# Altium PCB PCB_Project_Board_4.PcbDoc
Units mil, origin at the board's own origin, x right, y up, seen from the top; angles counter-clockwise.
Board outline 3900 x 3900 mil, 4 copper layers (Top Layer, GND_UPR, GND_DWN, Bottom Layer), stack 23.756 mil thick; 91 components, 63 nets, 327 pads, 72 vias.
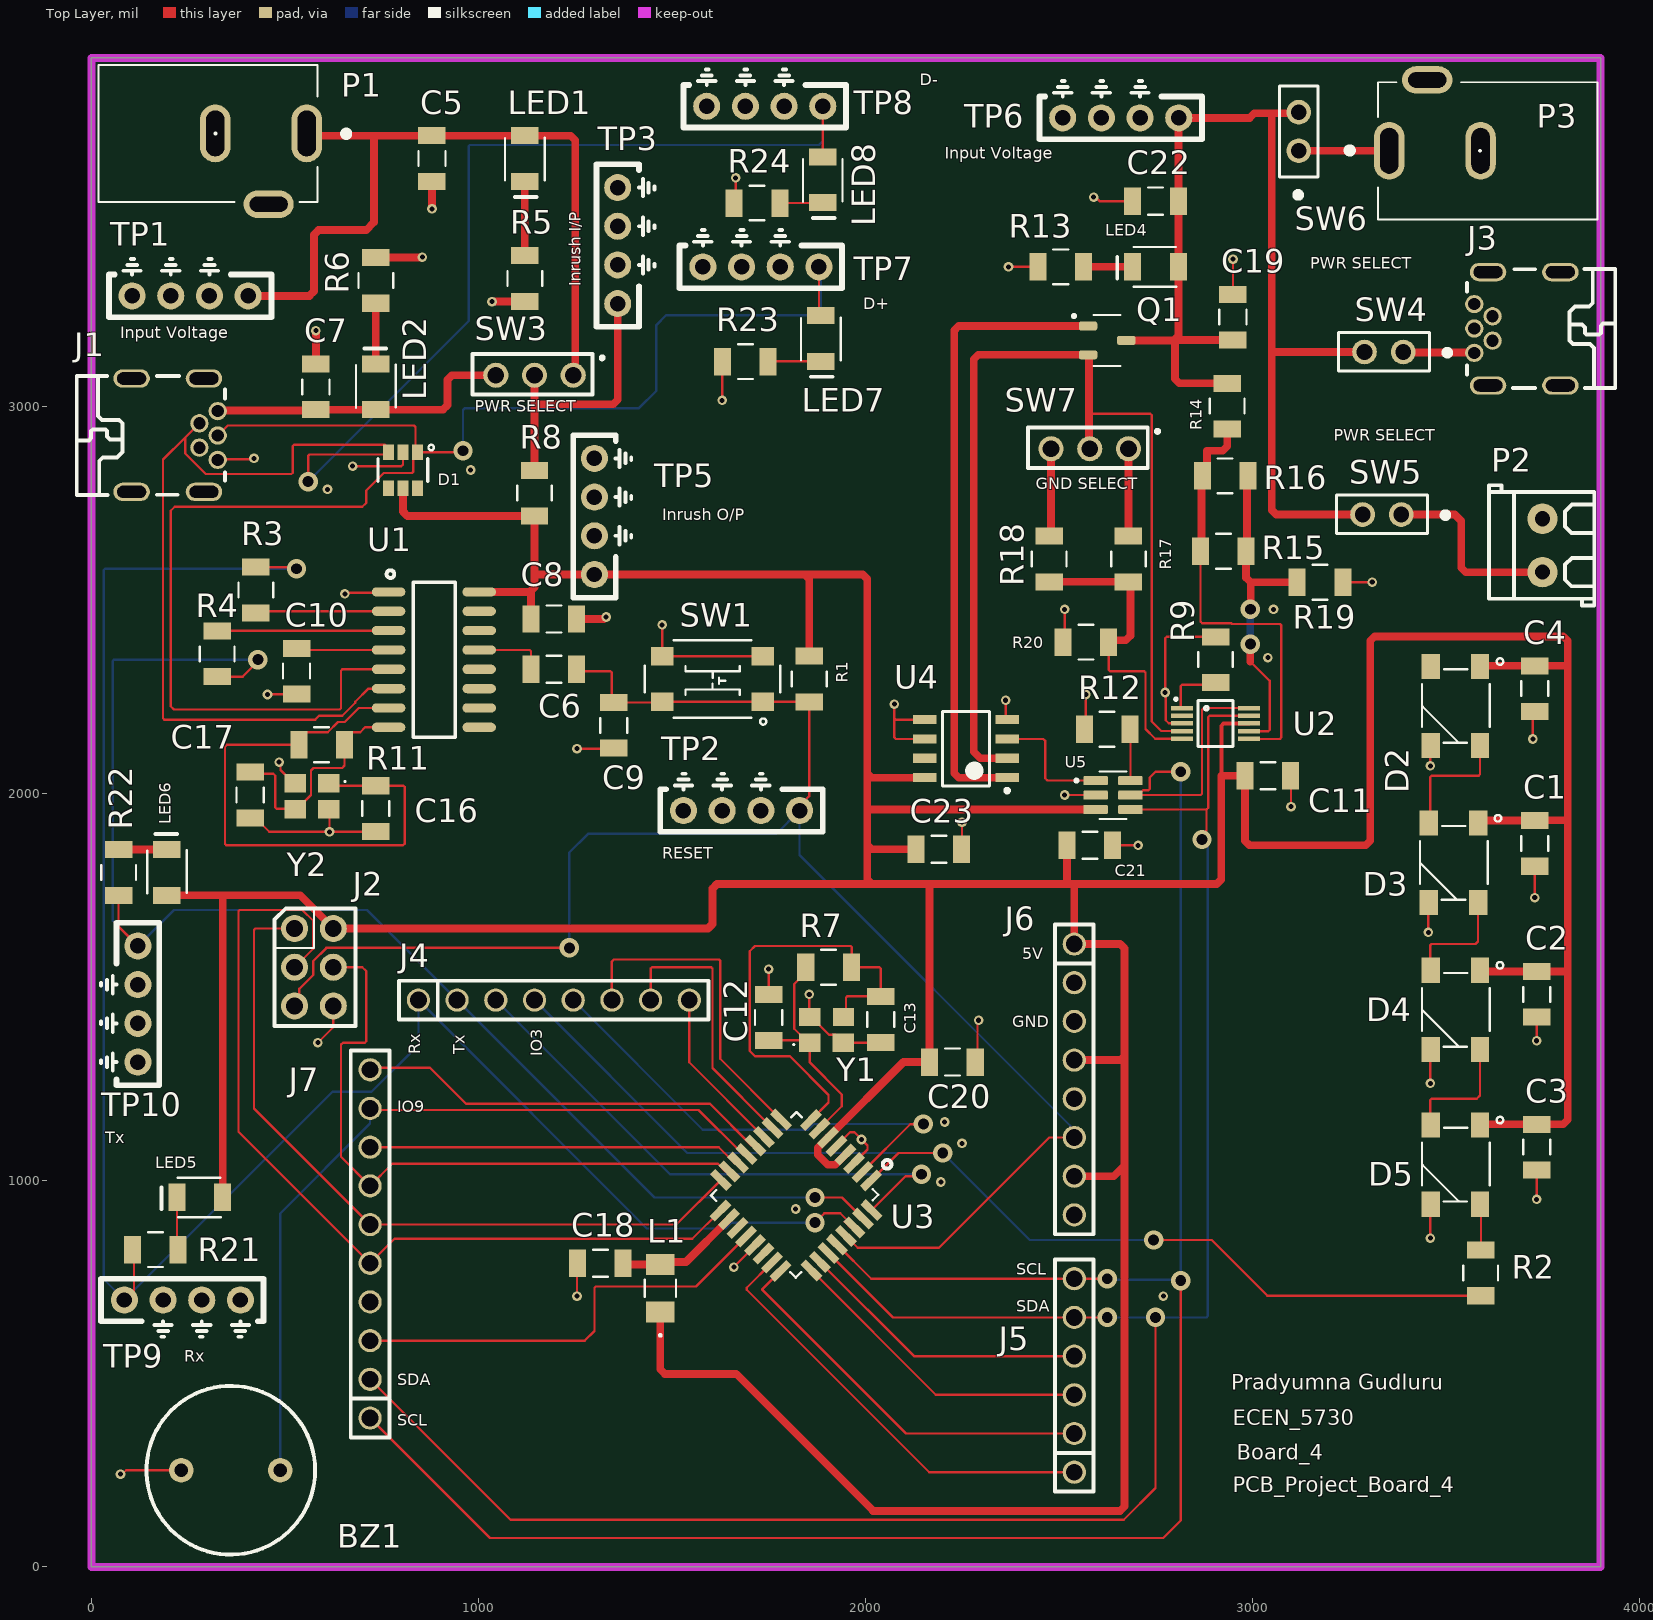
[diagram p0: Top Layer view]
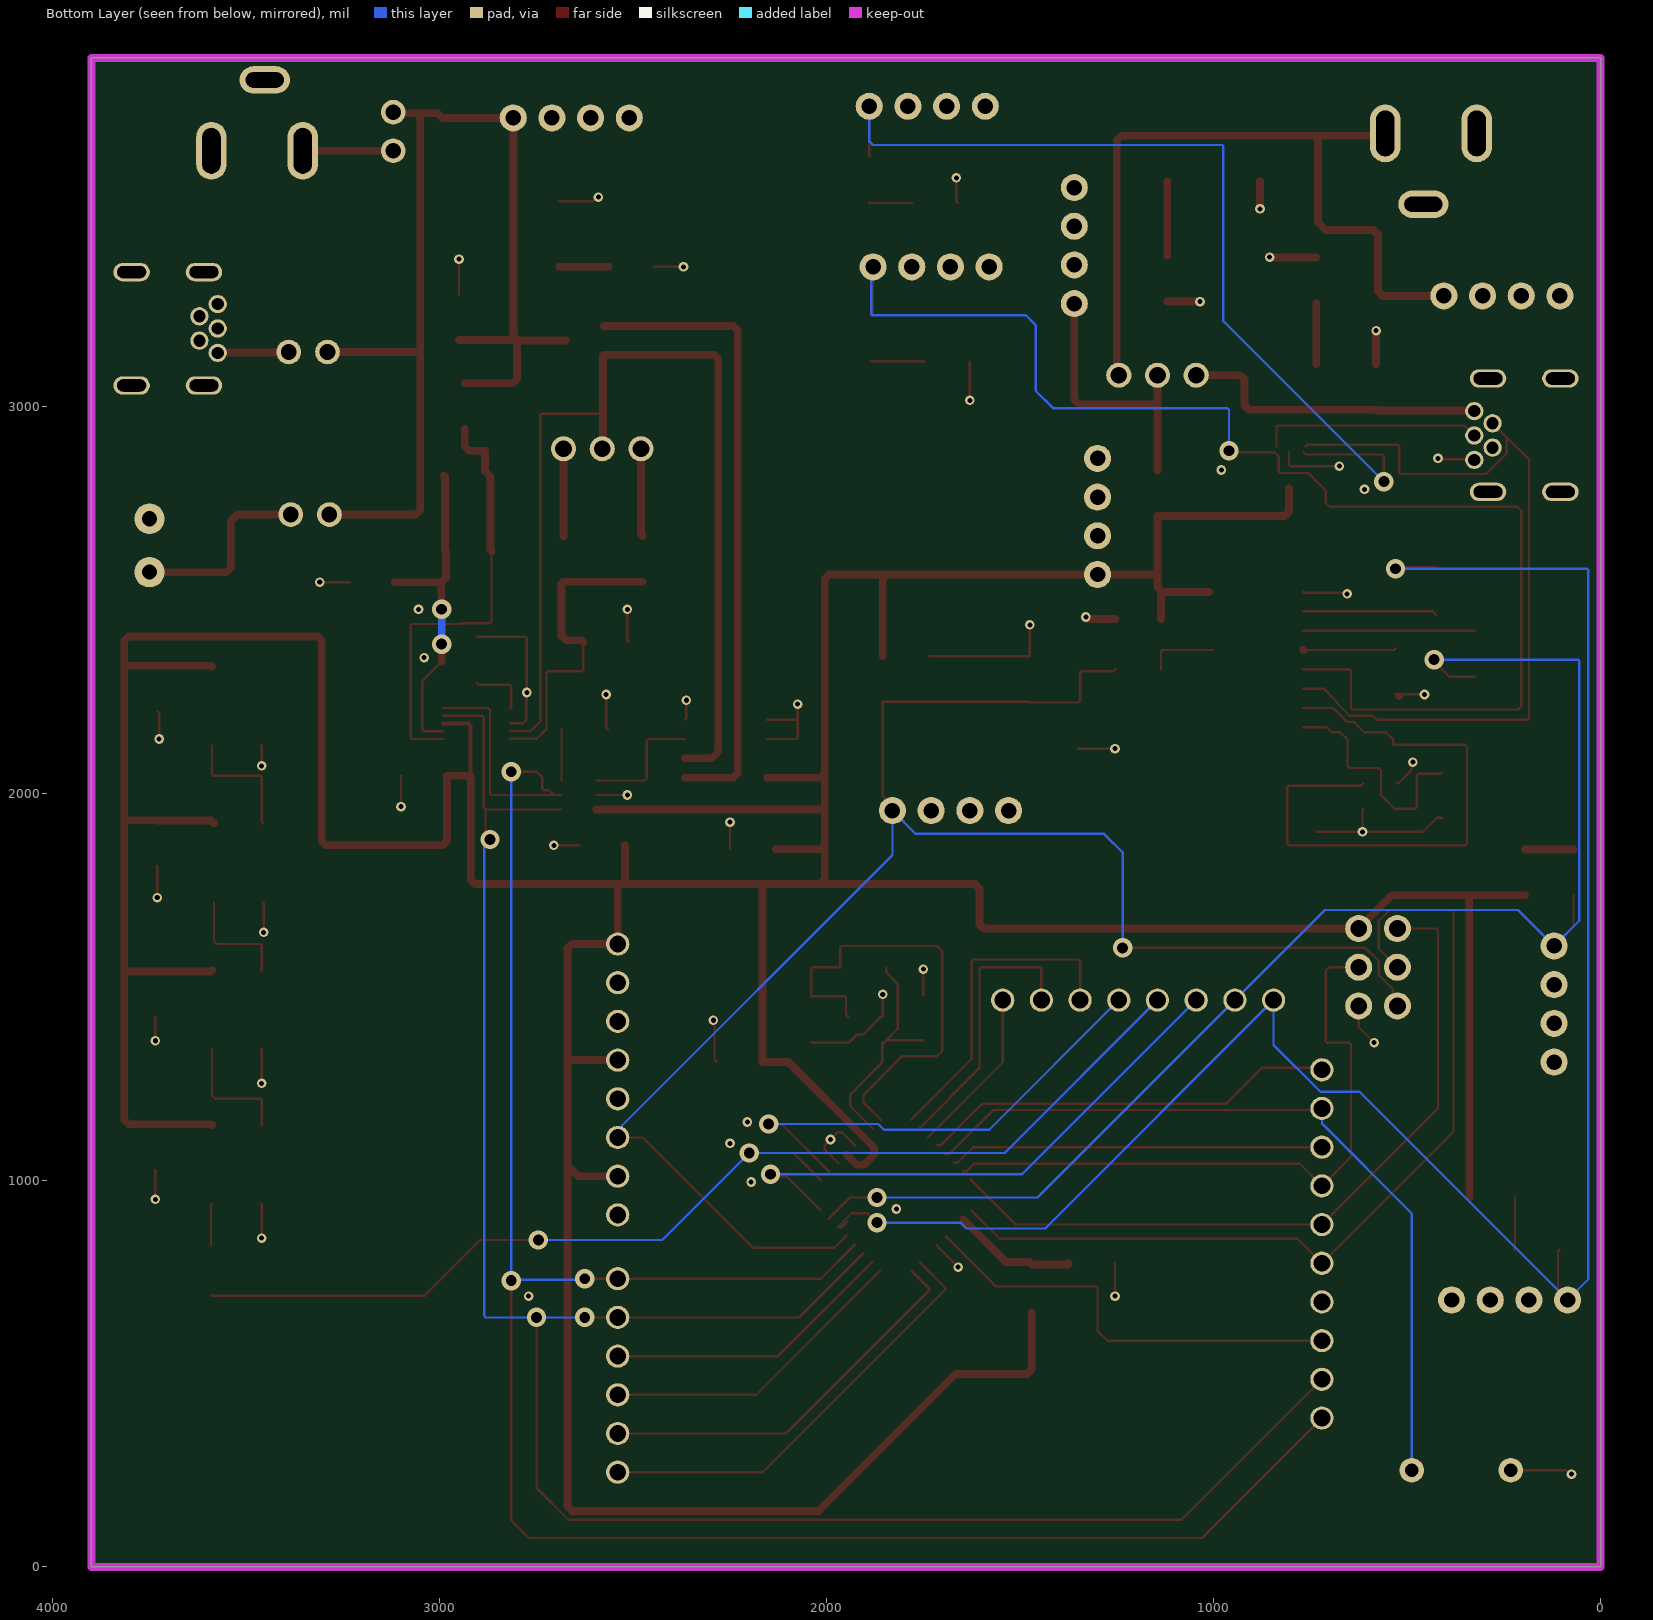
[diagram p1: Bottom Layer view, seen from below]
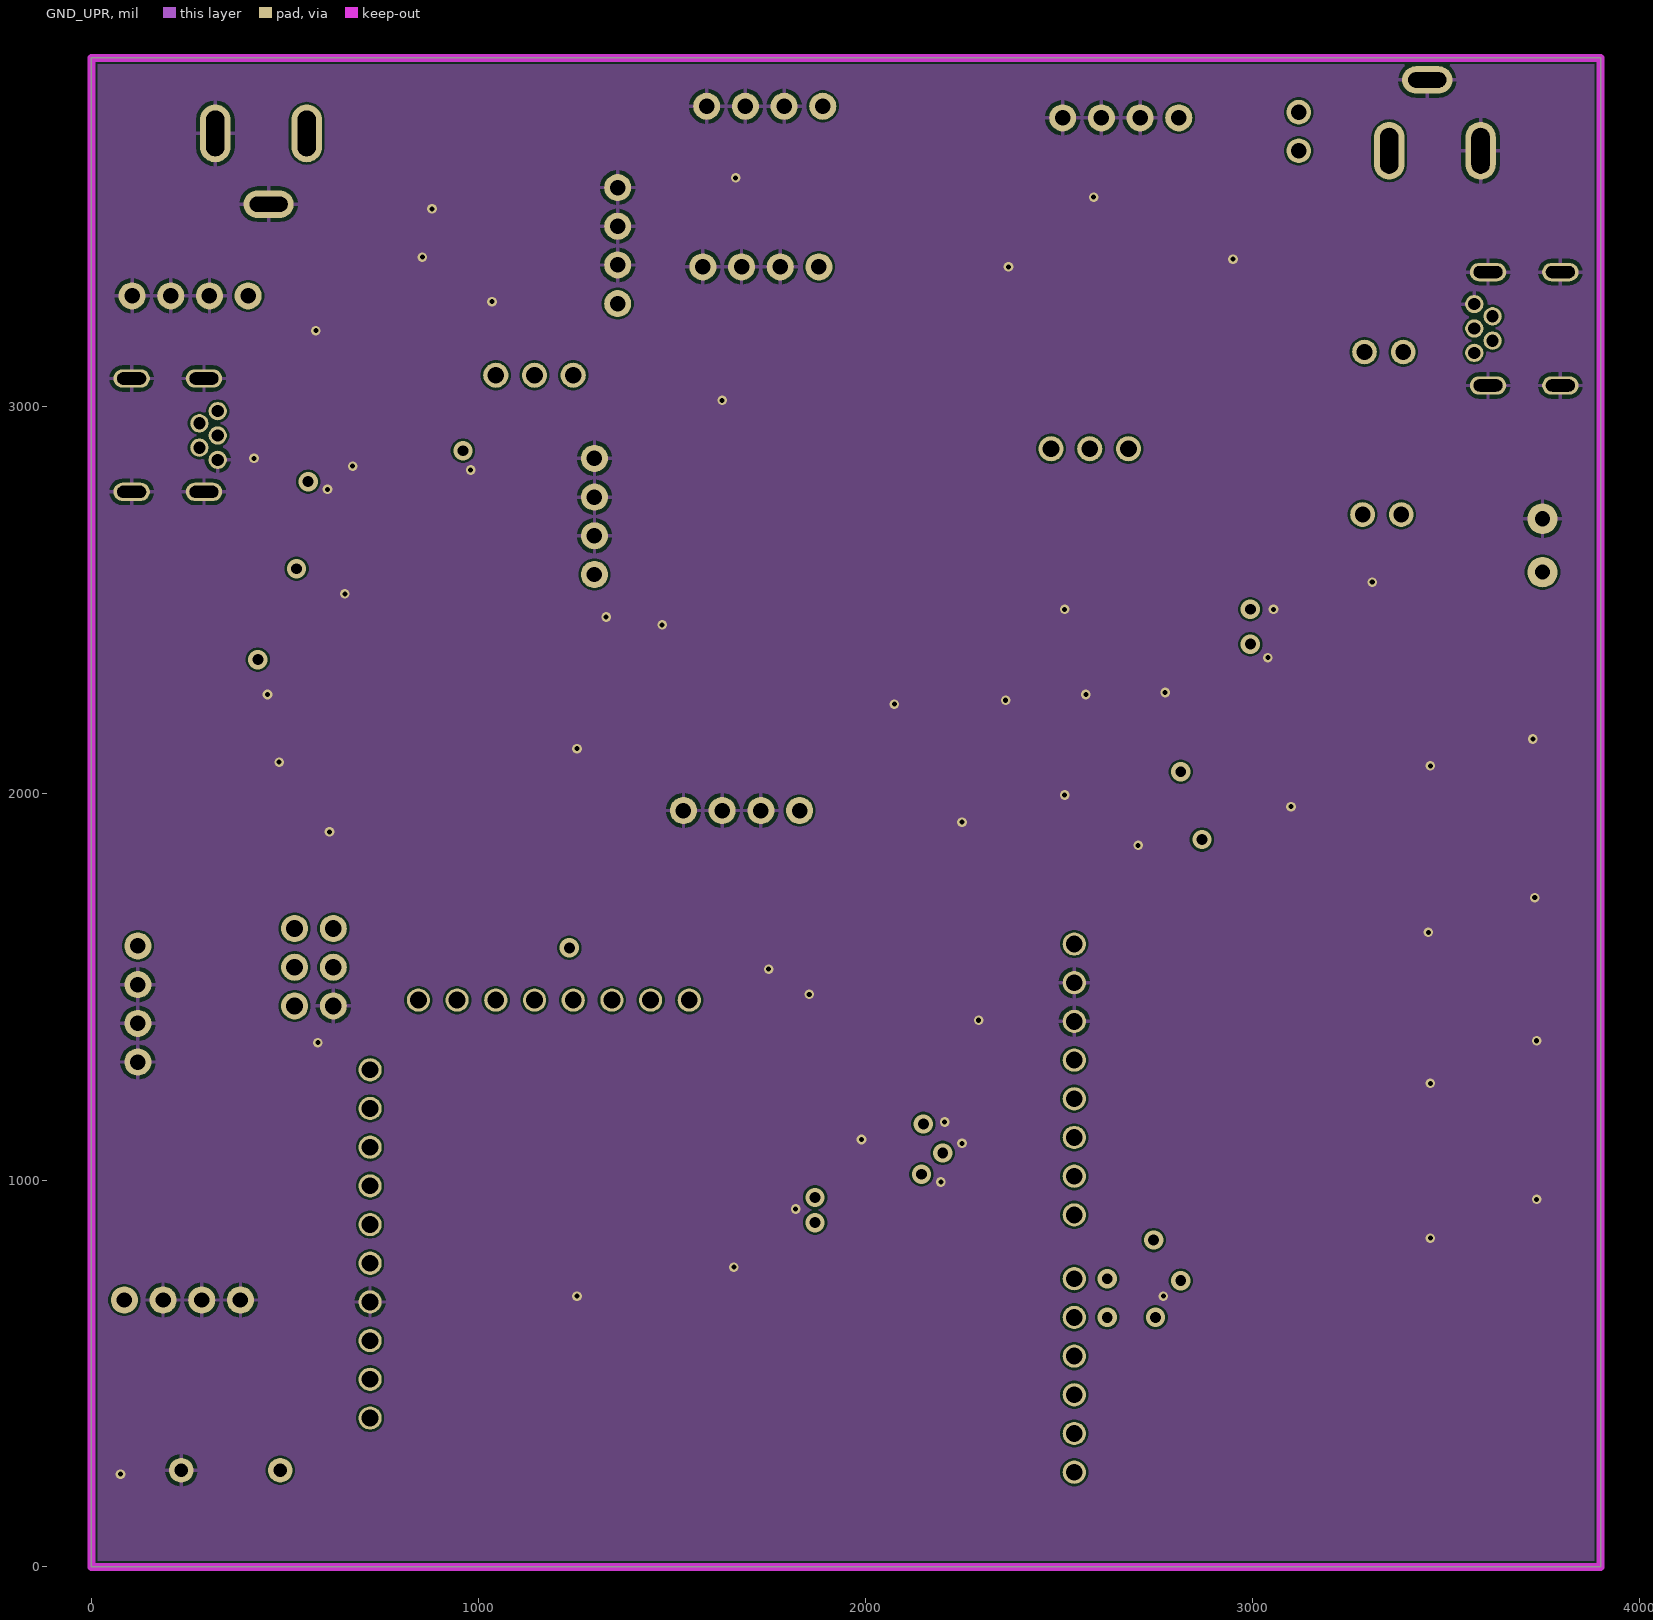
[diagram p2: GND_UPR]
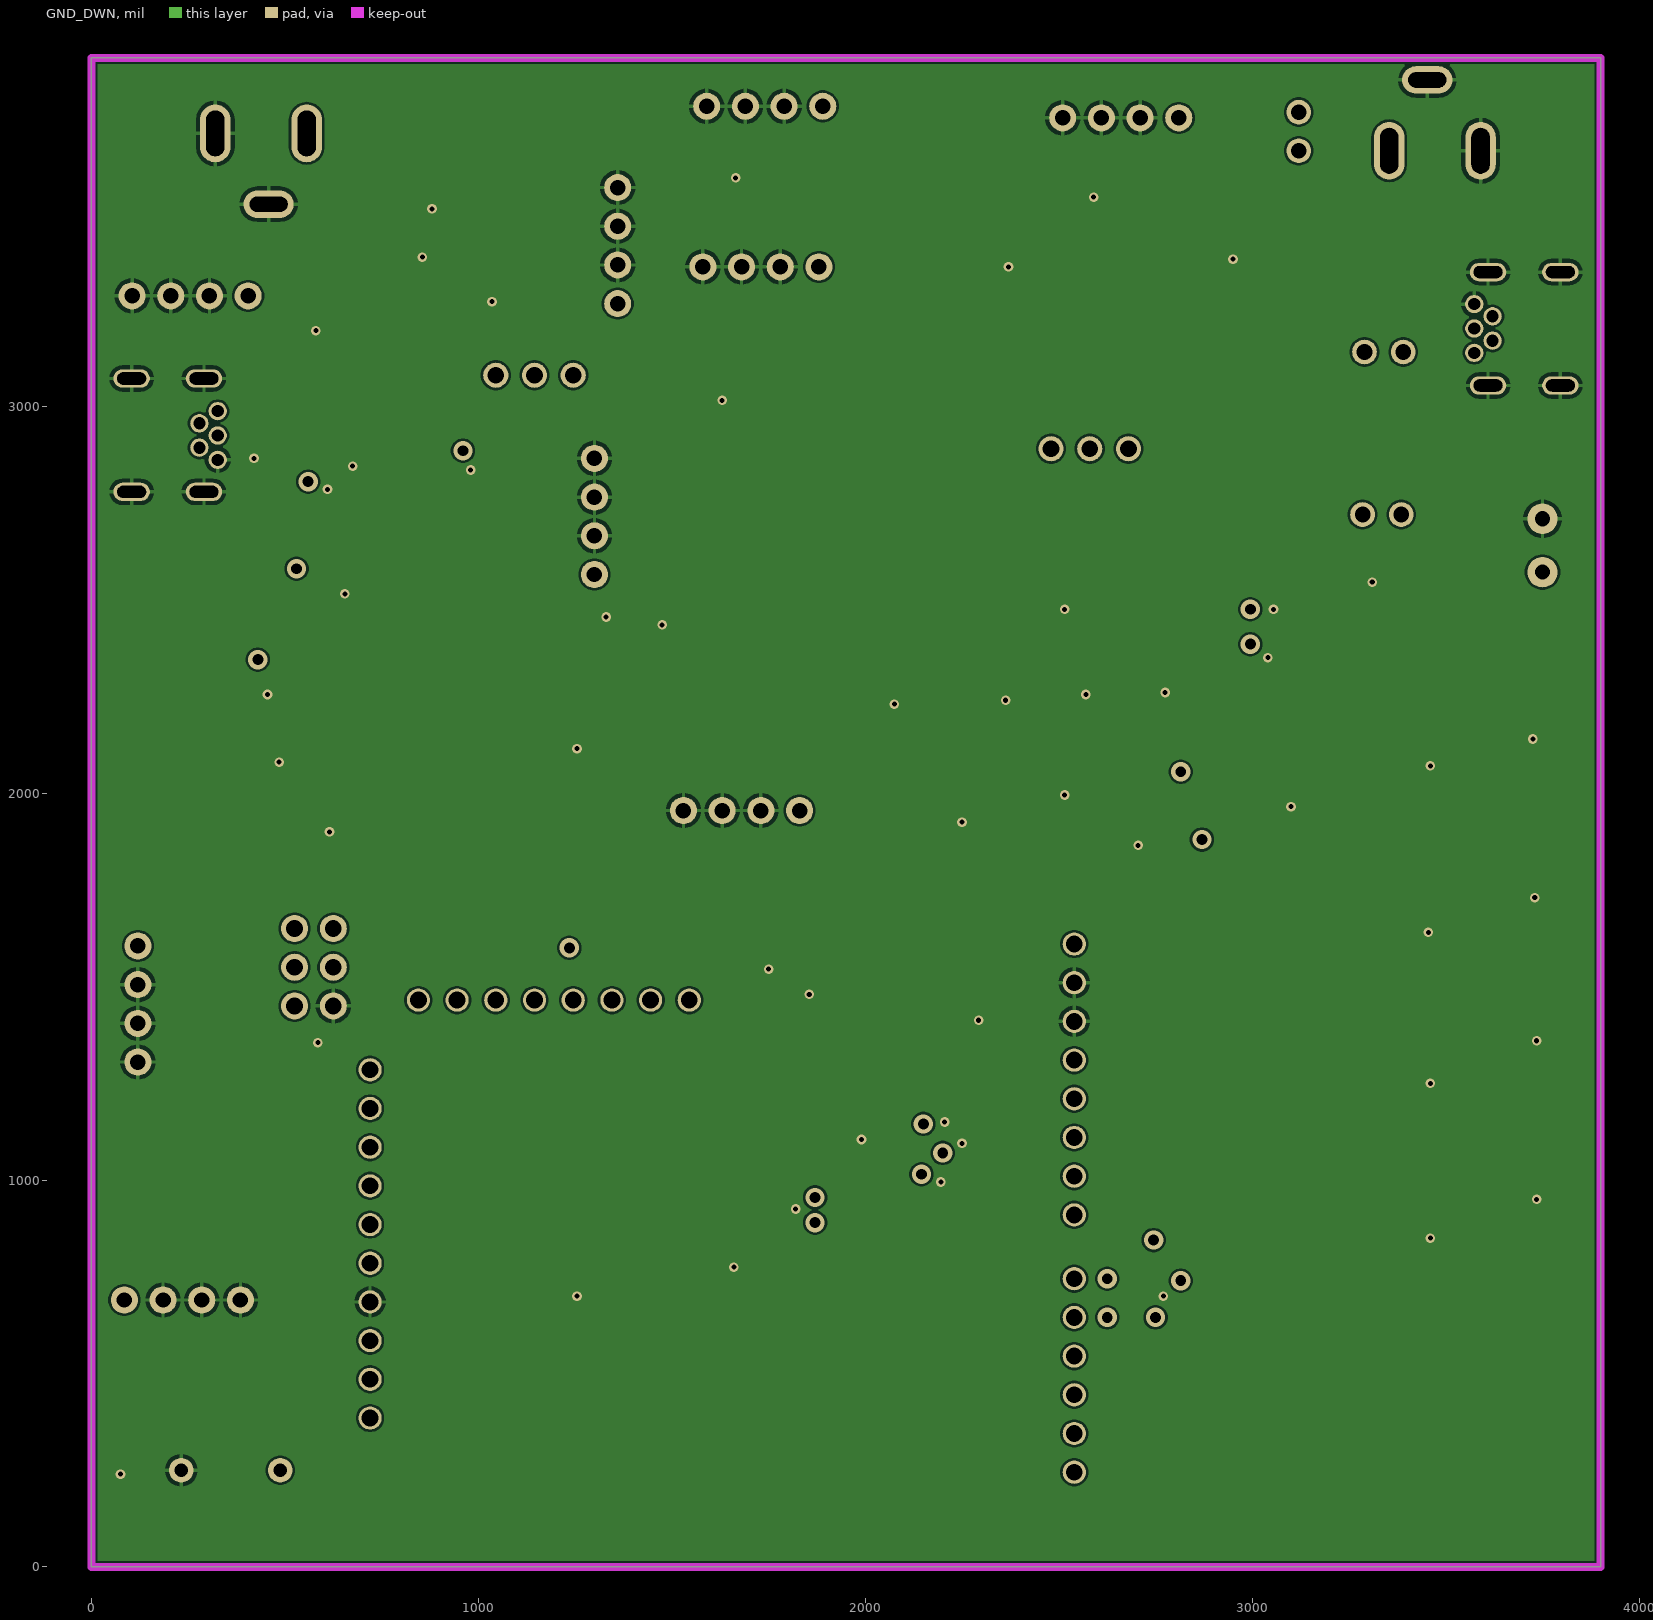
[diagram p3: GND_DWN]
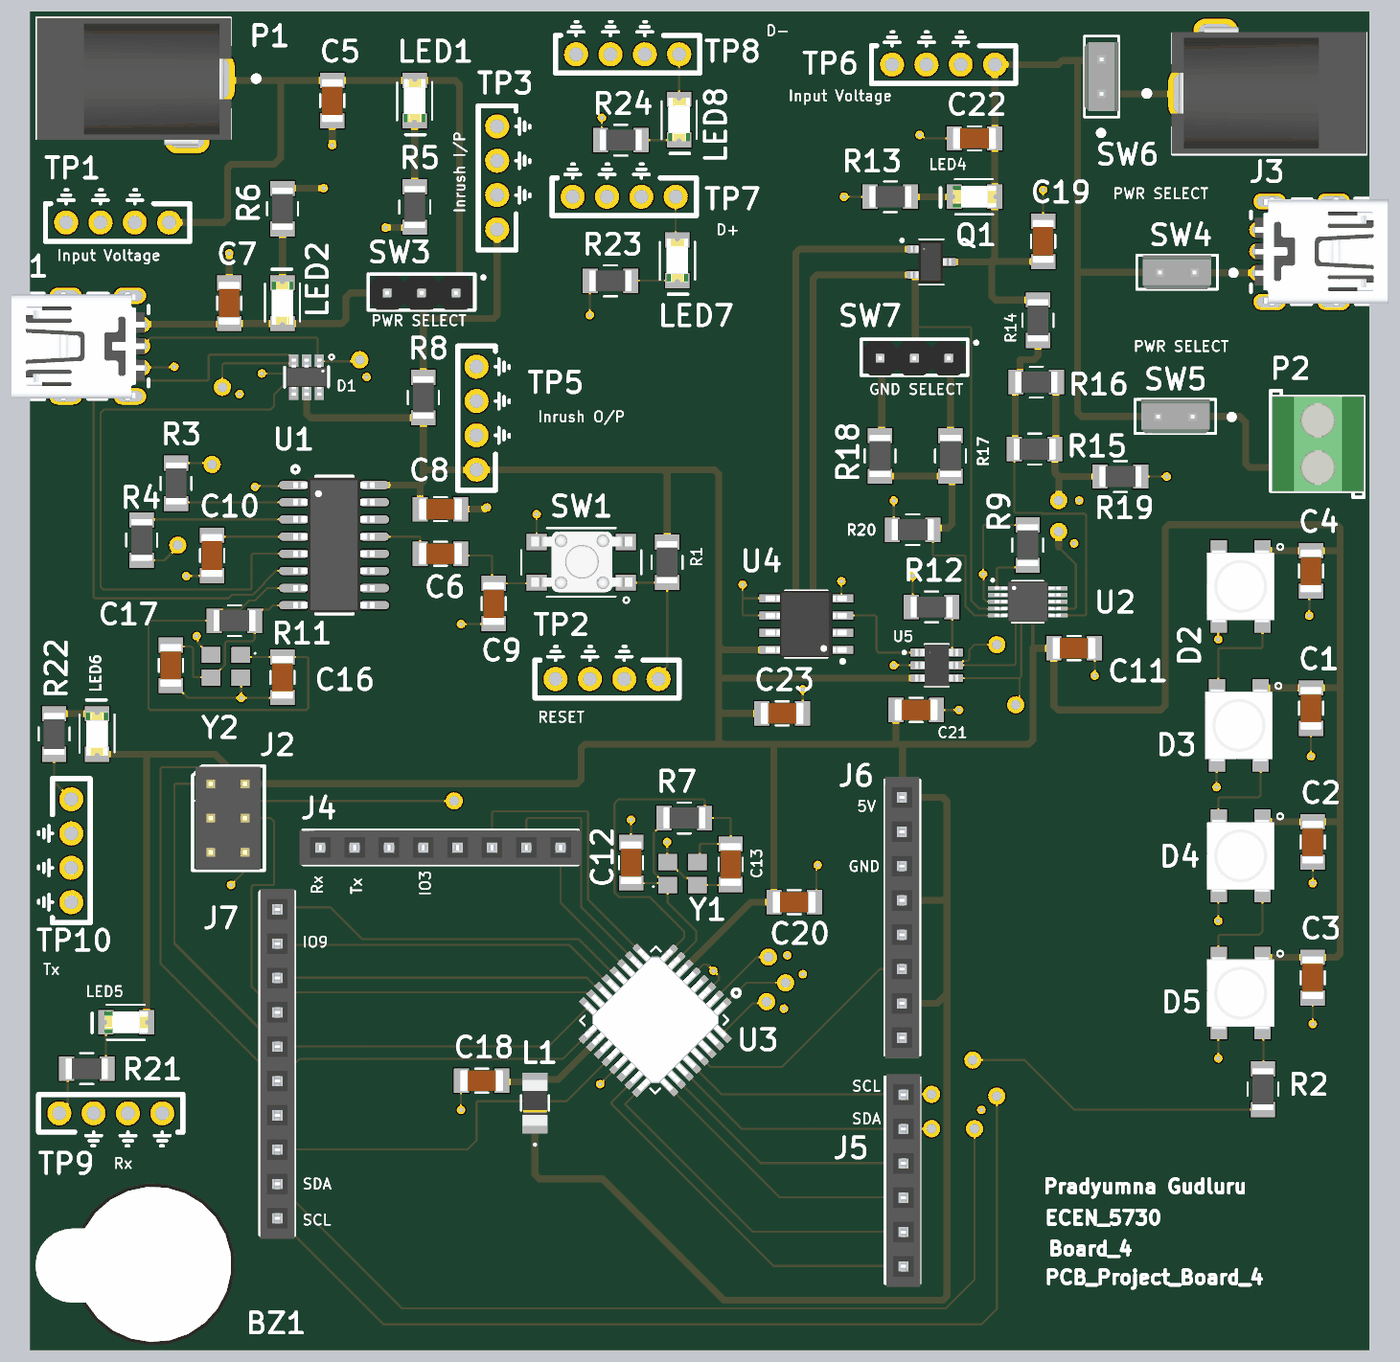
[diagram p4: 3D render of the assembled board from above, using the file's embedded part models]

## Layer stack, top to bottom
Top Solder: solder mask 0.4, Solder Resist, Dk 3.5
Top Layer: signal copper 1.4
Dielectric 2: prepreg 2.8, PP-006, Dk 4.1
GND_UPR: signal copper 1.378
Dielectric 1: dielectric 12.6, FR-4, Dk 4.8
GND_DWN: signal copper 1.378
Dielectric 3: prepreg 2.8, PP-006, Dk 4.1
Bottom Layer: signal copper 1.4
Bottom Solder: solder mask 0.4, Solder Resist, Dk 3.5

## Board outline
0,0 3900,0 3900,3900 0,3900

## Design rules (kind name [scope] priority, off if disabled: settings)
Clearance [All] p1: gap=6 ignorepadtopadclearanceinfootprint=FALSE
MinimumSolderMaskSliver [All] p1: minsoldermaskwidth=6
PlaneClearance [All] p1: clearance=10
PlaneConnect [All] p1: planeconnectstyle=Direct reliefexpansion=20 reliefentries=4 reliefconductorwidth=10 reliefairgap=10
PolygonConnect [All] p1: thpad.connectstyle=Relief thpad.reliefconductorwidth=10 thpad.reliefentries=4 thpad.polygonreliefangle="90 Angle" thpad.airgapwidth=10 smdpad.connectstyle=Direct smdpad.reliefconductorwidth=10 smdpad.reliefentries=4 smdpad.polygonreliefangle="90 Angle" smdpad.airgapwidth=10 via.connectstyle=Direct via.reliefconductorwidth=10 via.reliefentries=4 via.polygonreliefangle="90 Angle" via.airgapwidth=10
RoutingVias [All] p1: holewidth=13 width=25 viastyle="Through Hole" minholewidth=13 minwidth=25 maxholewidth=60 maxwidth=80
SilkToSilkClearance [All] p1: silktosilkclearance=6
SilkToSolderMaskClearance [IsPad] p1: minsilkscreentomaskgap=6 clearancetoexposedcopper=TRUE
SolderMaskExpansion [All] p1: expansion=4 istentingtop=FALSE
UnRoutedNet [All] p1: checkbadconnections=TRUE
Width "Schematic Width Constraint_9" [InNet('5V_Power_Jack')] p1: maxlimit=100 minlimit=10 preferedwidth=20 midlayer1_maxwidth=10 midlayer1_prefwidth=10 midlayer2_maxwidth=10 midlayer2_prefwidth=10 minimp=50.000000 maximp=50.000000 favimp=50.000000
Width "Schematic Width Constraint_8" [InNet('NetJ3_1')] p2: maxlimit=100 minlimit=10 preferedwidth=20 midlayer1_maxwidth=10 midlayer1_prefwidth=10 midlayer2_maxwidth=10 midlayer2_prefwidth=10 minimp=50.000000 maximp=50.000000 favimp=50.000000
Width "Schematic Width Constraint_7" [InNet('5V')] p3: maxlimit=100 minlimit=10 preferedwidth=20 midlayer1_maxwidth=10 midlayer1_prefwidth=10 midlayer2_maxwidth=10 midlayer2_prefwidth=10 minimp=50.000000 maximp=50.000000 favimp=50.000000
Width "Schematic Width Constraint_5" [InNet('NetR8_1')] p4: maxlimit=100 minlimit=10 preferedwidth=20 midlayer1_maxwidth=10 midlayer1_prefwidth=10 midlayer2_maxwidth=10 midlayer2_prefwidth=10 minimp=50.000000 maximp=50.000000 favimp=50.000000
Width "Schematic Width Constraint_4" [InNet('NetP3_1')] p5: maxlimit=100 minlimit=10 preferedwidth=20 midlayer1_maxwidth=10 midlayer1_prefwidth=10 midlayer2_maxwidth=10 midlayer2_prefwidth=10 minimp=50.000000 maximp=50.000000 favimp=50.000000
Width "Schematic Width Constraint_3" [InNet('VRM_IN')] p6: maxlimit=100 minlimit=10 preferedwidth=20 midlayer1_maxwidth=10 midlayer1_prefwidth=10 midlayer2_maxwidth=10 midlayer2_prefwidth=10 minimp=50.000000 maximp=50.000000 favimp=50.000000
Width "Schematic Width Constraint_2" [InNet('VUSB_5V')] p7: maxlimit=100 minlimit=10 preferedwidth=20 midlayer1_maxwidth=10 midlayer1_prefwidth=10 midlayer2_maxwidth=10 midlayer2_prefwidth=10 minimp=50.000000 maximp=50.000000 favimp=50.000000
Width "Schematic Width Constraint" [InNet('NetP2_1')] p8: maxlimit=100 minlimit=10 preferedwidth=20 midlayer1_maxwidth=10 midlayer1_prefwidth=10 midlayer2_maxwidth=10 midlayer2_prefwidth=10 minimp=50.000000 maximp=50.000000 favimp=50.000000
Width [All] p9: maxlimit=100 minlimit=6 preferedwidth=6
24 further rules are at their usual default settings.

## Components (designator, comment, footprint, x,y, rotation, side; value= is the part's Value field where it differs from the comment)
BZ1 "AT-1224-TWT-5V-2-R" "BUZZER- TH" 360,250 r90 top
C1 "10uF" 1206_Passive_Capacitor 3730,1870 r90 top
C2 "10uF" 1206_Passive_Capacitor 3735,1480 r90 top
C3 "10uF" 1206_Passive_Capacitor 3735,1085 r90 top
C4 "10uF" 1206_Passive_Capacitor 3730,2270 r90 top
C5 "22uF" 1206_Passive_Capacitor 880,3640 r90 top
C6 "22uF" 1206_Passive_Capacitor 1195,2320 r0 top
C7 "22uF" 1206_Passive_Capacitor 580,3050 r270 top
C8 "22uF" 1206_Passive_Capacitor 1195,2450 r180 top
C9 "1uF" 1206_Passive_Capacitor 1350,2175 r90 top
C10 "1uF" 1206_Passive_Capacitor 530,2315 r90 top
C11 "22uF" 1206_Passive_Capacitor 3040,2045 r0 top
C12 "22pF" 1206_Passive_Capacitor 1750,1420 r270 top
C13 "22pF" 1206_Passive_Capacitor 2040,1415 r90 top
C16 "22pF" 1206_Passive_Capacitor 735,1960 r90 top
C17 "22pF" 1206_Passive_Capacitor 410,1995 r90 top
C18 "22uF" 1206_Passive_Capacitor 1315,785 r0 top
C19 "1uF" 1206_Passive_Capacitor 2950,3230 r270 top
C20 "22uF" 1206_Passive_Capacitor 2225,1305 r180 top
C21 "10uF" 1206_Passive_Capacitor 2580,1865 r180 top
C22 "22uF" 1206_Passive_Capacitor 2750,3530 r0 top
C23 "10uF" 1206_Passive_Capacitor 2190,1855 r180 top
D1 "SRV05-4-P-T7" TVS 805,2835 r270 top value="TVS DIODE 5.5V 6TSOP"
D2 "IN-PI55QATPRPGPBPW" "SERIAL_LED - duplicate" 3525,2225 r270 top
D3 "IN-PI55QATPRPGPBPW" "SERIAL_LED - duplicate" 3520,1820 r270 top
D4 "IN-PI55QATPRPGPBPW" "SERIAL_LED - duplicate" 3525,1440 r270 top
D5 "IN-PI55QATPRPGPBPW" "SERIAL_LED - duplicate" 3525,1040 r270 top
J1 "USB Mini" USB_MINI_B 215,2925 r270 top value="USB mini B"
J2 "NRPN032PAEN-RC" ICSP 525,1650 r0 top
J3 "USB Mini" USB_MINI_B 3685,3200 r90 top value="USB mini B"
J4 "8Pin Header" "8_PIN_100MIL - Female" 845,1465 r0 top value=Female
J5 "6Pin Header" "6_PIN_100MIL -Female" 2540,245 r90 top value=Female
J6 "8Pin Header" "8_PIN_100MIL - Female" 2540,1610 r270 top value=Female
J7 "10Pin Header" "10_PIN_100MIL - Female" 720,385 r90 top value=Female
L1 "FB_10uH_1206" AIML-1206_ABR-M 1470,720 r90 top
LED1 "Green" LED_1206 1120,3640 r270 top
LED2 "Red" LED_1206 735,3050 r90 top
LED4 "Green" LED_1206 2750,3360 r180 top
LED5 "Red" LED_1206 280,955 r180 top
LED6 "Red" LED_1206 195,1795 r90 top
LED7 "Red" LED_1206 1885,3175 r270 top
LED8 "Red" LED_1206 1890,3585 r270 top
P1 "Power Jack" Power_Jack 556.22,3705 r180 top value="CONN PWR JACK 2X5.5MM SOLDER"
P2 "2P Screw Terminal Block" "P_Terminal block 3.5mm-pitch" 3750,2640 r90 top
P3 "Power Jack" Power_Jack 3353.78,3660 r0 top value="CONN PWR JACK 2X5.5MM SOLDER"
Q1 "AO3400A" N-MOSFET 2625,3170 r0 top value="N channel"
R1 "10k" 1206_Passive_Resitor 1855,2295 r90 top value=10KOhm
R2 "1k" 1206_Passive_Resitor 3590,760 r270 top value="1K Ohm"
R3 "100Ohm" 1206_Passive_Resitor 425,2525 r270 top
R4 "100Ohm" 1206_Passive_Resitor 325,2360 r90 top
R5 "1k" 1206_Passive_Resitor 1120,3330 r90 top value="1K Ohm"
R6 "1k" 1206_Passive_Resitor 735,3325 r90 top value="1K Ohm"
R7 "1M" 1206_Passive_Resitor 1905,1550 r0 top value="1M Ohm"
R8 "500m" 1206_Passive_Resitor 1145,2775 r270 top value=500mOhm
R9 "10k" 1206_Passive_Resitor 2905,2345 r270 top value=10KOhm
R11 "1M" 1206_Passive_Resitor 595,2125 r0 top value="1M Ohm"
R12 "10k" 1206_Passive_Resitor 2625,2165 r0 top value=10KOhm
R13 "1k" 1206_Passive_Resitor 2505,3360 r0 top value="1K Ohm"
R14 "10k" 1206_Passive_Resitor 2935,3000 r90 top value=10KOhm
R15 "10k" 1206_Passive_Resitor 2925,2625 r180 top value=10KOhm
R16 "10k" 1206_Passive_Resitor 2930,2820 r180 top value=10KOhm
R17 "10 Ohm" 1206_Passive_Resitor 2680,2605 r90 top
R18 "1 Ohm" 1206_Passive_Resitor 2475,2605 r90 top value=1Ohm
R19 "0 Ohm" 1206_Passive_Resitor 3175,2545 r180 top
R20 "0 Ohm" 1206_Passive_Resitor 2570,2390 r0 top
R21 "1k" 1206_Passive_Resitor 165,820 r0 top value="1K Ohm"
R22 "1k" 1206_Passive_Resitor 70,1795 r90 top value="1K Ohm"
R23 "1k" 1206_Passive_Resitor 1690,3115 r0 top value="1K Ohm"
R24 "1k" 1206_Passive_Resitor 1720,3525 r0 top value="1K Ohm"
SW1 "TL3305AF160QG" Switch_JLC 1605,2295 r180 top
SW3 "PREC003SAAN-RC" 3_PIN_100mil 1245,3080 r180 top value="CONN HEADER VERT 3POS 2.54MM"
SW4 "SW_2Pin_100mil_Switch" 2Pin-Header-Conn 3390,3140 r180 top
SW5 "SW_2Pin_100mil_Switch" 2Pin-Header-Conn 3385,2720 r180 top
SW6 "SW_2Pin_100mil_Switch" 2Pin-Header-Conn 3120,3660 r90 top
SW7 "PREC003SAAN-RC" 3_PIN_100mil 2680,2890 r180 top value="CONN HEADER VERT 3POS 2.54MM"
TP1 "Power" TP10x_Probe 255,3285 r180 top
TP2 "RST" TP10x_Probe 1680,1955 r180 top
TP3 "VIN_INRUSH" TP10x_Probe 1360,3415 r90 top
TP5 "VOUT_INRUSH" TP10x_Probe 1300,2715 r90 top
TP6 "Power" TP10x_Probe 2660,3745 r180 top
TP7 "D+_TP" TP10x_Probe 1730,3360 r180 top
TP8 "D-_TP" TP10x_Probe 1740,3775 r180 top
TP9 "RX_MCU_TP" TP10x_Probe 235,690 r0 top
TP10 "TX_MCU_TP" TP10x_Probe 120,1455 r270 top
U1 "CH340G" "USB to serial" 885,2345 r270 top value="USB to Serial"
U2 "ADS1115IDGSR" ADC_ADS1115IDGSR 2905,2180 r0 top
U3 "ATMEGA328P-ANR" ATMega328P 1820,960 r45 top value="IC MCU 8BIT 32KB FLASH 32TQFP"
U4 "MCP6002T-I/SN" SOIC127P600X175-8N 2260,2115 r180 top
U5 "DAC IC" MCP4725 2640,1995 r0 top
Y1 "X322516MLB4SI" "Crystal resonator" 1900,1390 r0 top value=16MHz
Y2 "X322512MSB4SI" "Crystal resonator" 570,1990 r180 top value=12MHz

## Footprints (in the part's own frame and the unit in brackets; to place one, negate y for a bottom-side part, rotate by r counter-clockwise, add the part's x,y. Pads: shape width x height; smd on the part's side, far side on the other; paste and mask are expansions set on the pad)
2Pin-Header-Conn [mm]
  round 1.62 hole 1.02: 1(0,0) 2(2.54,0)
  silkscreen extent -3.03,-1.27 4.26,1.26, body extent -1.27,-1.27 3.81,1.27, height 8.13
3_PIN_100mil [mm]
  round 1.65 hole 1.1: 1(0,0) 2(2.54,0) 3(5.08,0)
  silkscreen extent -2,-1.4 6.6,1.27, body extent -1.14,-1.27 6.48,1.27, height 8.38
"6_PIN_100MIL -Female" [mil]
  round 60 hole 43.31: 1(0,0) 2(100,0) 3(200,0) 4(300,0) 5(400,0) 6(500,0)
  silkscreen extent -50,-50 550,50, body extent -61,-53 559,47, height 335
"8_PIN_100MIL - Female" [mil]
  round 60 hole 43.31: 1(0,0) 2(100,0) 3(200,0) 4(300,0) 5(400,0) 6(500,0) 7(600,0) 8(700,0)
  silkscreen extent -50,-50 750,50, body extent -60,-51 760,49, height 335
"10_PIN_100MIL - Female" [mil]
  round 60 hole 43.31: 1(0,0) 2(100,0) 3(200,0) 4(300,0) 5(400,0) 6(500,0) 7(600,0) 8(700,0) 9(800,0) 10(900,0)
  silkscreen extent -50,-50 950,50, body extent -61,-50 959,50, height 335
1206_Passive_Capacitor [mil]
  rect 44x71 smd: 1(-59,0) 2(59,0)
  silkscreen extent -19,-35 19,35, body extent -63,-31 63,32, height 50
1206_Passive_Resitor [mil]
  rect 44x71 smd: 1(-59,0) 2(59,0)
  silkscreen extent -19,-45 19,45, body extent -61,-31 61,31, height 26
ADC_ADS1115IDGSR [mm] "*SOP50P490X110-10N"
  rect 1.45x0.3 smd mask+0.025: 1(-2.2,1)
  rect 1.47x0.3 smd mask+0.025: 2(-2.2,0.5) 3(-2.2,0) 4(-2.2,-0.5) 5(-2.2,-1) 6(2.2,-1) 7(2.2,-0.5) 8(2.2,0) 9(2.2,0.5) 10(2.2,1)
  silkscreen extent -2.68,-1.5 1.15,1.68, body extent -2.44,-1.49 2.46,1.51, height 1.1
AIML-1206_ABR-M [mil]
  rect 54x73 smd paste+0 mask+0: 1(-61.5,0) 2(61.5,0)
  silkscreen extent -124,-40 22,40, body extent -66,-36 66,36, height 55
ATMega328P [mm]
  rect 1.55x0.508 smd mask+0.025: 1(4.2,-2.794) 2(4.2,-2.007) 3(4.2,-1.194) 4(4.2,-0.406) 5(4.2,0.406) 6(4.2,1.194) 7(4.2,2.007) 8(4.2,2.794) 17(-4.2,2.794) 18(-4.2,2.007) 19(-4.2,1.194) 20(-4.2,0.406) 21(-4.2,-0.406) 22(-4.2,-1.194) 23(-4.2,-2.007) 24(-4.2,-2.794)
  rect 0.508x1.55 smd mask+0.025: 9(2.843,4.2) 10(2.056,4.2) 11(1.243,4.2) 12(0.455,4.2) 13(-0.357,4.2) 14(-1.145,4.2) 15(-1.958,4.2) 16(-2.745,4.2) 25(-2.745,-4.2) 26(-1.958,-4.2) 27(-1.145,-4.2) 28(-0.357,-4.2) 29(0.455,-4.2) 30(1.243,-4.2) 31(2.056,-4.2) 32(2.843,-4.2)
  silkscreen extent -3.94,-3.81 5.97,3.94, body extent -4.45,-4.47 4.55,4.53, height 1.16
"BUZZER- TH" [mm]
  round 1.6 hole 0.9: 1(0,3.25) 2(0,-3.25)
  silkscreen extent -5.54,-5.54 5.54,5.53, body extent -6,-6 6,8.75, height 9.05
"Crystal resonator" [mil]
  rect 55.11x47.24 smd: 1(-43.3,-35.43) 2(43.31,-35.43) 3(43.32,31.5) 4(-43.3,31.5)
  silkscreen extent -87,-42 -83,-38, body extent -65,-47 65,47, height 31
ICSP [mil]
  round 70 hole 43.31: 1(0,0) 2(0,-100) 3(0,-200) 4(100,0) 5(100,-100) 6(100,-200)
  silkscreen extent -52,-252 157,52, body extent -44,-250 146,50, height 330
LED_1206 [mil]
  rect 44x71 smd: 1(-59,0) 2(59,0)
  silkscreen extent -54,-51 99,51, body extent -63,-31 63,31, height 28
MCP4725 [mm]
  rrect25% 1.61x0.59 smd: 1(-1.145,0.95) 2(-1.145,0) 3(-1.145,-0.95) 4(1.145,-0.95) 5(1.145,0) 6(1.145,0.95)
  silkscreen extent -2.5,-1.56 0.9,1.56, body extent -1.6,-1.55 1.6,1.55, height 1.45
N-MOSFET [mm]
  rrect50% 1.21x0.59 smd: 1(-1.255,0.95) 2(-1.255,-0.95) 3(1.255,0)
  silkscreen extent -2.28,-1.68 0.89,1.7, body extent -1.55,-1.55 1.45,1.55, height 1.25
"P_Terminal block 3.5mm-pitch" [mm]
  round 2 hole 1: 1(-1.75,0) 2(1.75,0)
  silkscreen extent -3.95,-3.4 3.95,3.5, body extent -3.5,-3.4 3.5,3.4, height 8.4
Power_Jack [mm]
  oval 2x3.8 hole 1.2 slot 3 at 90 deg: 1(0,0) 2(6,0)
  oval 3.3x1.8 hole 1 slot 2.5 at 0 deg: 3(2.5,4.65)
  silkscreen extent -2.79,-4.5 13.68,4.5, body extent -0.76,-4.45 13.64,4.95, height 11.49
"SERIAL_LED - duplicate" [mil] "Footprint for serial LED"
  rect 64.96x47.5 smd: 1(-102.36,63.5) 2(-102.36,-63.5) 3(102.36,-63.5) 4(102.36,63.5)
  silkscreen extent -124,-87 95,124, body extent -106,-98 106,98, height 63
SOIC127P600X175-8N [mm] "SOIC, 8-Leads, Body 4.90x3.90mm, Pitch 1.27mm, IPC Medium Density"
  rect 1.55x0.6 smd: 1(-2.7,1.905) 2(-2.7,0.635) 3(-2.7,-0.635) 4(-2.7,-1.905) 5(2.7,-1.905) 6(2.7,-0.635) 7(2.7,0.635) 8(2.7,1.905)
  silkscreen extent -2.83,-2.45 1.55,2.88, body extent -3,-2.45 3,2.45, height 1.75
Switch_JLC [mm]
  rect 1.5x1.2 smd: 1(-3.3,1.5) 2(3.3,1.5) 3(-3.3,-1.5) 4(3.3,-1.5)
  silkscreen extent -4.44,-2.54 4.45,3, body extent -3.8,-2.29 3.7,2.21, height 3.7
TP10x_Probe [mil] "Small Probs footprint"
  round 70 hole 40: 1(-150,0) 2(-50,0) 2(50,0) 2(150,0)
  silkscreen extent -210,-95 210,55
TVS [mm]
  rect 1x0.7 smd mask+0.025: 1(-1.162,0.95) 2(-1.162,0) 3(-1.162,-0.95) 4(1.2,-0.95) 5(1.2,0) 6(1.2,0.95)
  silkscreen extent -1.65,-1.63 0.76,2.03, body extent -1.37,-1.44 1.38,1.46, height 1.1
"USB to serial" [mil]
  oval 24x86.61 smd: 1(-175,-117) 2(-125,-117) 3(-75,-117) 4(-25,-117) 5(25,-117) 6(75,-117) 7(125,-117) 8(175,-117) 9(175,117) 10(125,117) 11(75,117) 12(25,117) 13(-25,117) 14(-75,117) 15(-125,117) 16(-175,117)
  silkscreen extent -231,-122 201,56, body extent -197,-118 197,118, height 71
USB_MINI_B [mm]
  round 1.2 hole 0.8: 1(-1.58,2.826) 2(-0.78,1.622) 3(0.02,2.826) 4(0.82,1.622) 5(1.62,2.826)
  oval 1.2x2.4 hole 0.8 slot 1.9 at 90 deg: 6(-3.72,1.924) 7(3.72,1.924) 8(-3.72,-2.826) 9(3.72,-2.826)
  silkscreen extent -3.89,-6.42 3.93,3.3, body extent -4.04,-6.83 4.06,3.02, height 3.98

## Part data
BZ1: library part BUZZER_1, "Buzzers Transducer, Externally Driven Electromechanical/Magnetic 5 V 40mA 2.4kHz 87dB @ 5V, 10cm Through Hole PC Pins", Datasheet=https://www.puiaudio.com/media/SpecSheet/AT-1224-TWT-5V-2-R.pdf, MFR Part #=AT-1224-TWT-5V-2-R
C1 C2 C3 C4 C21 C23: library part C_10uF_1206, "10uF ±10% 50V X5R 1206 Multilayer Ceramic Capacitors MLCC - SMD/SMT RoHS", LCSC Part#=C13585, MFR Part #=CL31A106KBHNNNE, Datasheet=https://datasheet.lcsc.com/lcsc/1810221112_Samsung-Electro-Mechanics-CL31A106KBHNNNE_C13585.pdf, Type=Basic
C5 C6 C7 C8 C11 C18 C20 C22: library part C_22uF_1206, "22uF ±10% 25V X5R 1206 Multilayer Ceramic Capacitors MLCC - SMD/SMT RoHS", LCSC Part#=C12891, MFR Part #=CL31A226KAHNNNE, Datasheet=https://datasheet.lcsc.com/lcsc/1811031514_Samsung-Electro-Mechanics-CL31A226KAHNNNE_C12891.pdf, Type=basic
C9 C10 C19: library part C_1uF_1206, "MULTILAYER CERAMIC CAPACITORS MLCC - SMD/SMT 1UF 50V 1206 ROHS", LCSC Part#=C1848, MFR Part #=CL31B105KBHNNNE, Digikey Link=https://www.digikey.com/product-detail/en/C1206C105M4RACTU/399-8150-1-ND/3471873/?itemSeq=304982366, Type=Basic
C12 C13 C16 C17: library part C_22pF_1206, "22pF ±5% 1kV C0G 1206 Multilayer Ceramic Capacitors MLCC - SMD/SMT RoHS", LCSC Part#=C313096, MFR Part #=1206CG220J102NT, Datasheet=https://datasheet.lcsc.com/lcsc/1810311150_FH-Guangdong-Fenghua-Advanced-Tech-1206CG220J102NT_C313096.pdf, Type=Extended
D1: library part D_TVS_Diode, "TVS SOT-23-6 ROHS", LCSC Part#=C85364, Datasheet=https://datasheet.lcsc.com/szlcsc/ProTek-Devices-SRV05-4-P-T7_C85364.pdf, MFR Part #=SRV05-4-P-T7, Type=Basic
D2 D3 D4 D5: library part LED_Smart, "LIGHT EMITTING DIODES (LED) RGB 620~630NM RED, 520~530NM GREEN, 465~475NM BLUE 600MCD@16MARED,1200MCD@16MAGREEN,300MCD@16MABLUE TOP VIEW SMD-4 ROHS", LCSC Part#=C2761795, Manufacturer=Inolux, MFR Part #=IN-PI55QATPRPGPBPW-60, Datasheet=https://datasheet.lcsc.com/lcsc/2106062036_Worldsemi-WS2812B-B-W_C2761795.pdf
J1 J3: library part J_USB_B_Mini, "Through Hole USB Connectors RoHS", LCSC Part#=C46398, MFR Part #=920-462A2021D10102, Datasheet=https://datasheet.lcsc.com/szlcsc/2103081233_Jing-Extension-of-the-Electronic-Co-920-462A2021D10102_C46398.pdf, Type=Extended
J2: library part J_ICSP, "Connector Header Through Hole 6 position 0.079\" (2.00mm)", LCSC Part#=C124384, Digikey Link=https://www.digikey.com/product-detail/en/NRPN032PAEN-RC/S5801-03-ND/804955/?itemSeq=304982355, MFR Part #=NRPN032PAEN-RC, Type=Extended
J4 J6: library part JF_8_PIN_FEMALE, "8 Position Header Connector 0.100\" (2.54mm) Through Hole Tin", LCSC Part#=C27438, MFR Part #=PPTC081LFBN-RC, Digikey Link=https://www.digikey.com/product-detail/en/PPTC081LFBN-RC/S7006-ND/810147/?itemSeq=304982354, Type=Extended
J5: library part JF_6_PIN_FEMALE, "6 Position Header Connector 0.100\" (2.54mm) Through Hole Tin", LCSC Part#=C40877, MFR Part #=PPTC061LFBN-RC, Digikey Link=https://www.digikey.com/product-detail/en/PPTC061LFBN-RC/S7004-ND/810145/?itemSeq=304982353, Type=Extended
J7: library part JF_10_PIN_FEMALE_, "10 Position Header Connector 0.100\" (2.54mm) Through Hole Tin", LCSC Part#=C225507, MFR Part #=PPTC101LFBN-RC, Digikey Link=https://www.digikey.com/product-detail/en/PPTC101LFBN-RC/S7008-ND/810149/?itemSeq=304982352, Type=Extended
L1: "25mA 10uH ±10% 800mΩ 1206  Inductors (SMD) ROHS", LCSC Part#=C1051, MFR Part #=CMI321609X100KT, Mfr_Name="FH (Guangdong Fenghua Advanced Tech)", Datasheet=https://datasheet.lcsc.com/lcsc/1810311314_FH--Guangdong-Fenghua-Advanced-Tech-CMI321609X100KT_C1051.pdf, Type=Basic
LED1 LED4: library part LED_GREEN_1206, "Green 513~528nm 1206 Light Emitting Diodes (LED) RoHS", LCSC Part#=C434439, MFR Part #=SZYY1206G, Datasheet=https://datasheet.lcsc.com/lcsc/2006301532_Yongyu-Photoelectric-SZYY1206G_C434439.pdf, Type=Extended
LED2 LED5 LED6 LED7 LED8: library part LED_RED_1206, "Red 621~631nm 1206 Light Emitting Diodes (LED) RoHS", LCSC Part#=C93133, MFR Part #=15-21/R6C-FQ1R1B/2T, Datasheet=https://datasheet.lcsc.com/szlcsc/1811151241_Everlight-Elec-15-21-R6C-FQ1R1B-2T_C93133.pdf, Type=Extended
P1 P3: library part "P_Power Jack", "Power Barrel Connector Jack 2.10mm ID (0.083\"), 5.50mm OD (0.217\") Through Hole, Right Angle", LCSC Part#=C136744, MFR Part #=PJ-102A, Digikey Link=https://www.digikey.com/product-detail/en/PJ-102A/CP-102A-ND/275425/?itemSeq=304982367, Type=Extended
P2: library part "P_Terminal block", "Green Straight pin 3.5mm  pitch; P=3.5mm  Screw terminal ROHS", LCSC Part#=C474892, Manufacturer="Cixi Kefa Elec", MFR Part #=KF350-3.5-2P, Datasheet=https://datasheet.lcsc.com/lcsc/2001160007_Cixi-Kefa-Elec-KF350-3-5-2P_C474892.pdf
Q1: library part Q_Nch_MOSFET, "MOSFET N Trench 30V 5.7A 1.5V @ 250uA 26.5 m? @ 5.7A,10V SOT-23-3L RoHS", LCSC Part#=C20917, Datasheet=https://datasheet.lcsc.com/szlcsc/Alpha-Omega-Semicon-AOS-AO3400A_C20917.pdf, MFR Part #=AO3400A, Type=Basic
R1 R9 R12 R14 R15 R16: library part R_10KOhm_1206, "10 kOhms ±5% 0.25W, 1/4W Chip Resistor 1206 (3216 Metric) Automotive AEC-Q200 Thick Film", LCSC Part#=C17902, MFR Part #=RMCF1206FT10K0, Digikey Link=https://www.digikey.com/en/products/detail/stackpole-electronics-inc/RMCF1206FT10K0/1759669, Type=Basic
R2 R5 R6 R13 R21 R22 R23 R24: library part R_1K_1206, "CHIP RESISTOR - SURFACE MOUNT 1KOHMS ±1% 1/4W 1206 ROHS", LCSC Part#=C4410, MFR Part #=RNCP1206FTD1K00CT, Digikey Link=https://www.digikey.com/product-detail/en/RNCP1206FTD1K00/RNCP1206FTD1K00CT-ND/2240675/?itemSeq=304982373, Type=Basic
R3 R4: library part R_100Ohm_1206, "100Ω ±1% 0.25W ±100ppm/℃ 1206 Chip Resistor - Surface Mount RoHS", LCSC Part#=C17901, MFR Part #=1206W4F1000T5E, Datasheet=https://datasheet.lcsc.com/lcsc/2206010145_UNI-ROYAL-Uniroyal-Elec-1206W4F1000T5E_C17901.pdf, Type=Basic
R7 R11: library part R_1M_1206, "CHIP RESISTOR - SURFACE MOUNT 1MOHMS ±1% 1/4W 1206 ROHS", LCSC Part#=C17927, MFR Part #=RMCF1206JT1M00, Digikey Link=https://www.digikey.com/product-detail/en/RMCF1206JT1M00/RMCF1206JT1M00CT-ND/1942830/?itemSeq=304982358, Type=Basic
R8: library part R_500mOhm_1206, "Resistors/Shunt 250mW 500mΩ ±800ppm/℃ ±5% 1206  Current Sense  Resistors ROHS", LCSC Part#=C247433, MFR Part #=1206W4J050KT5E, Datasheet=https://datasheet.lcsc.com/lcsc/1810301438_UNI-ROYAL-Uniroyal-Elec-1206W4J050KT5E_C247433.pdf, Type=Extended
R17: library part R_10Ohm_1206, "CHIP RESISTOR - SURFACE MOUNT 0.1OHMS ±1% 1/4W 1206 ROHS", LCSC Part#=C17903, MFR Part #=1206W4F100JT5E, Datasheet=https://datasheet.lcsc.com/szlcsc/Uniroyal-Elec-1206W4F100JT5E_C17903.pdf, Type=Basic
R18: library part R_1Ohm_1206, "1Ω ±5% 0.25W ±400ppm/℃ 1206 Chip Resistor - Surface Mount RoHS", LCSC Part#=C1409, MFR Part #=1206W4J010JT5E, Datasheet=https://datasheet.lcsc.com/lcsc/1810301410_UNI-ROYAL-Uniroyal-Elec-1206W4J010JT5E_C1409.pdf, Type=Extended
R19 R20: library part R_0Ohm_1206, "CHIP RESISTOR - SURFACE MOUNT 0OHMS ±1% 1/4W 1206 ROHS", LCSC Part#=C17888, MFR Part #=1206W4F0000T5E, Datasheet=https://datasheet.lcsc.com/szlcsc/Uniroyal-Elec-1206W4F0000T5E_C17888.pdf, Mouser link=https://www.mouser.com/ProductDetail/Royalohm/1206W4F0000T5E?qs=e8oIoAS2J1Thbopin%252BsagQ%3D%3D, Type=Basic
SW1: library part SW_Push_Button_JLC, "Tactile Switch SPST-NO Top Actuated Surface Mount", LCSC Part#=C2837550, MFR Part #=KH-4.5X4.5X4.3H-STM, Datasheet=https://datasheet.lcsc.com/lcsc/2106081532_Shenzhen-Kinghelm-Elec-KH-4.5X4.5X4.3H-STM_C2837550.pdf, Type=Extended
SW3 SW7: library part SW_3Pin_100mil_Switch, "Connector Header Through Hole 3 position 0.100\" (2.54mm)", LCSC Part#=C49257, Digikey Link=https://www.digikey.com/product-detail/en/PREC003SAAN-RC/S1012EC-03-ND/2774851/?itemSeq=304982371, MFR Part #=PREC003SAAN-RC, Type=Extended
SW4 SW5 SW6: "2Pin Header", LCSC Part#=C124375, Type=Extended
TP1 TP2 TP3 TP5 TP6 TP7 TP8 TP9 TP10: library part TP_10x_Probe, "Test Point 300 mil centers"
U1: library part U_USBtoSerial, "Transceiver USB 2.0 2Mbps SOP-16_150mil USB ICs RoHS", LCSC Part#=C14267, Datasheet=https://datasheet.lcsc.com/lcsc/2008191806_WCH-Jiangsu-Qin-Heng-CH340G_C14267.pdf, MFR Part #=CH340G, Type=Basic
U2: library part U_ADC_ADS1115IDGSR, "16-Bit ADC with Integrated MUX, PGA, Comparator, Oscillator, and Reference 10-VSSOP -40 to 125", LCSC Part#=C37593, Package="MSOP-10 Texas Instruments", Digikey Link=https://www.digikey.com/product-detail/en/texas-instruments/ADS1115IDGSR/296-38849-1-ND/5142969?utm_source=snapeda&utm_medium=aggregator&utm_campaign=symbol, MFR Part #=ADS1115IDGSR, SnapEDA_Link=https://www.snapeda.com/parts/ADS1115IDGSR/Texas%20Instruments/view-part/?ref=snap, Type=Extended
U3: library part U_ATMega328P, "AVR AVR® ATmega Microcontroller IC 8-Bit 20MHz 32KB (16K x 16) FLASH 32-TQFP (7x7)", LCSC Part#=C14877, MFR Part #=ATMEGA328P-AU, Digikey Link=https://www.digikey.com/product-detail/en/ATMEGA328P-ANR/ATMEGA328P-ANRCT-ND/2774230/?itemSeq=304982365, Type=Basic
U4: library part U_MCP6002T-I/SN, "0.6 V/us 2 1MHz 1.8V ~ 6V 100μA General Purpose SOIC-8_150mil  Operational Amplifier ROHS", LCSC Part#=C7377, Mfr=Microchip, Datasheet=https://ww1.microchip.com/downloads/en/DeviceDoc/MCP6001-1R-1U-2-4-1-MHz-Low-Power-Op-Amp-DS20001733L.pdf, MFR Part #=MCP6002T-I/SN, Type=Basic
U5: library part U_MCP4725A0T-E/CH, "IC DAC 12BIT V-OUT SOT23-6", LCSC Part#=C144198, MFR Part #=MCP4725A0T-E/CH, Datasheet=https://ww1.microchip.com/downloads/en/DeviceDoc/22039d.pdf, Type=Extended
Y1: library part X_16Mhz_Res, "±10ppm 16000000Hz -40℃~85℃ 贴片无源晶振 60Ω 9pF SMD3225-4P Crystals ROHS", LCSC Part#=C13738, MFR Part #=X322516MLB4SI, Type=Basic
Y2: library part X_12MHz_Res, "SMD Crystal Resonators 12MHz ±10ppm SMD-3225_4P RoHS", LCSC Part#=C9002, Datasheet=https://datasheet.lcsc.com/szlcsc/Yangxing-Tech-X322512MSB4SI_C9002.pdf, MFR Part #=X322512MSB4SI, Type=Basic

## Via types
v1: diameter 25, hole 13, Top Layer to Bottom Layer, 53 vias
v2: diameter 50, hole 28, Top Layer to Bottom Layer, 19 vias

## Nets (pads, with @x,y where several pads share a name; then routed paths per layer and width w, separated by ;. In a path a pad name is that pad's centre, name@x,y a point inside that pad or via, vN(x,y) a via of type N, cw(c..) or ccw(c..) an arc to the next point about the centre after c; other vN are vias at no path point)
5V: C1.2 C2.2 C3.2 C4.2 C8.2 C11.1 C20.2 C21.2 C23.2 D1.5 D2.1 D3.1 D4.1 D5.1 J2.4 J6.1 J6.4 J6.7 L1.1 LED5.1 LED6.1 R1.2 R8.2 TP5.1 U1.16 U2.8 U3.4 U3.6 U4.8 U5.3 | length 15995.5
  Top Layer w10: 2520,1765 2521,1766 ; 2920,2045 2920,2174.14 2925.86,2180 U2.8
  Top Layer w20: LED6.1 340,1736 ; LED5.1 339,1735 340,1736 ; D1.5 805,2727.72 816.72,2716 R8.2 1145,2570 ; U1.16@1012,2520 1133.28,2520 ; C8.2 1136,2517.28 1133.28,2520 ; L1.1 1470,510.72 1481.72,499 1666,499 2020,145 2658.28,145 2670,156.72 2670,1038.43 ; R1.2 1855,2553.28 1843.28,2565 ; U3.4 1922.22,1039.59 1902.82,1039.59 1876.96,1065.45 1876.96,1083.43 U3.6 2098.53,1305 C20.2 2166,1764 2165,1765 ; C23.2 2016.72,1855 2005,1866.72 ; U4.8 2016.72,2040 2005,2051.72 ; 2521,1766 C21.2 ; J6.7 2641.57,1010 2670,1038.43 ; J6.4 2658.28,1310 2670,1321.72 ; U5.3 2005,1957.6 ; D3.1 3590.14,1929 C1.2 3731,1930 3815,1930 ; D5.1 3590.14,1144 C3.2 3803.28,1144 3815,1155.72 3815,1542.86 ; D4.1 3591.86,1539 C2.2 3811.14,1539 3815,1542.86 ; D2.1 3590.14,2329 C4.2 3814,2329 3815,2330 ; 340,1736 539.41,1736 625,1650.41 J2.4 1593.28,1650 1605,1661.72 1605,1753.28 1616.72,1765 2016.72,1765 ; 1133.28,2520 1145,2531.72 1145,2570 ; 1145,2570 1150,2565 TP5.1 1843.28,2565 ; 1843.28,2565 1993.28,2565 2005,2553.28 2005,2051.72 ; 2005,1866.72 2005,1776.72 2016.72,1765 ; 2005,1866.72 2005,1957.6 ; 2005,1957.6 2005,2051.72 ; 2016.72,1765 2165,1765 ; 2165,1765 2520,1765 2535,1765 ; 2535,1765 2908.28,1765 2920,1776.72 2920,2045 C11.1 2981,1876.72 2992.72,1865 3293.28,1865 3305,1876.72 3305,2393.28 3316.72,2405 3803.28,2405 3815,2393.28 3815,2330 ; 2535,1765 2540,1760 J6.1 2658.28,1610 2670,1598.28 2670,1321.72 ; 2670,1038.43 2670,1321.72 ; 3815,1542.86 3815,1930 ; 3815,1930 3815,2330
5V_Power_Jack: C5.2 LED1.1 P1.1 SW3.1 TP1.1 | length 2024
  Top Layer w15: P1.1 P1.1@562.22,3699
  Top Layer w20: TP1.1 563.28,3285 575,3296.72 575,3443.28 586.72,3455 710,3455 730,3475 730,3699 ; P1.1@562.22,3699 730,3699 ; SW3.1 1250,3085 1250,3687.28 1238.28,3699 LED1.1 C5.2 730,3699
AD0: J5.1 U3.23 | length 1139.7
  Top Layer w6: U3.23 1693.35,721.62 1693.35,716.65 2165,245 J5.1
AD1: J5.2 U3.24 | length 1029.4
  Top Layer w6: U3.24 1732.77,717.2 2104.97,345 J5.2
AD2: J5.3 U3.25 | length 812.7
  Top Layer w6: U3.25 2182.17,445 J5.3
AD3: J5.4 U3.26 | length 758.5
  Top Layer w6: U3.26 2126.01,545 J5.4
AD4/SDA: J5.5 J7.2 U2.9 U3.27 U5.4 | length 5572.8
  Top Layer w6: J7.2 1083,122 2667.81,122 2750,204.19 v2(2750,645) ; U3.27 2071.26,645 J5.5 v2(2625,645) ; U5.4 2881.49,1957.6 ; v2(2870,1880) 2870,1891.91 2881.49,1903.39 2881.49,1957.6 ; U2.9 2991.3,2200 2889.51,2200 2886,2196.49 2886,1962.11 2881.49,1957.6
  Bottom Layer w6: v2(2625,645) v2(2750,645) 2881.49,645 2885,648.51 2885,1870 2875,1880 v2(2870,1880)
AD5/SCL: J5.6 J7.1 U2.10 U3.28 U5.5 | length 5782.1
  Top Layer w6: J7.1 1030,75 2770,75 2815,120 v2(2815,740) ; U3.28 2015.1,745 J5.6 v2(2625,745) ; U5.5 U5.5@2705.16,1995 ; v2(2815,2055) 2750,2055 2735.23,2040.23 2735.23,2011.3 2731.71,2007.79 2717.94,2007.79 U5.5@2705.16,1995 ; U2.10 2990.98,2220 2875,2220 2870,2215 2870,1998.51 2866.49,1995 U5.5@2705.16,1995
  Bottom Layer w6: v2(2625,745) 2627.5,742.5 2812.5,742.5 v2(2815,740) v2(2815,2055)
AREF: J7.3 U3.20 | length 1148.7
  Top Layer w6: J7.3 1275,585 1300,610 1300,721.49 1303.51,725 1562.37,725 U3.20
AVCC: C18.2 L1.2 U3.18 | length 323.3
  Top Layer w20: C18.2 1377.5,781.5 L1.2 1476.72,788.22 1536.5,788.22 U3.18
CH_XTAL1: C16.2 R11.1 U1.7 Y2.1 | length 1538.6
  Top Layer w6: Y2.1 619.73,2019 C16.2 806.49,2019 810,2015.49 810,1870 805,1865 348.51,1865 345,1868.51 345,2120 350,2125 R11.1 536,2138.5 555,2157.5 610.44,2157.5 636.94,2184 654.74,2184 690.74,2220 U1.7
CH_XTAL2: C17.2 R11.2 U1.8 Y2.3 | length 609.7
  Top Layer w6: C17.2 414,2050 470,2050 475,2045 475,1963.51 478.51,1960 525.18,1960 Y2.3 530.62,1958.5 567.24,1995.13 567.24,2058.73 573.51,2065 648,2065 654,2071 R11.2 654,2138.5 673,2157.5 694.44,2157.5 706.94,2170 U1.8
D+: D1.1 J1.3 LED7.1 TP7.1 U1.5 | length 4091
  Top Layer w6: J1.3 352.04,2950 833.89,2950 837.4,2946.49 D1.1@837.4,2895.77 ; U1.5 648.51,2320 645,2316.49 645,2219.51 641.49,2216 213.51,2216 205,2224.51 205,2730 215,2740 700,2740 710,2750 710,2782.01 755.34,2827.35 828.26,2827.35 831.78,2830.87 831.78,2870.15 D1.1 955.77,2880.77 v2(960,2885) ; TP7.1 1880,3239 LED7.1
  Bottom Layer w6: v2(960,2885) 960,2990 965,2995 1415,2995 1460,3040 1460,3210 1485,3235 1881.49,3235 1885,3238.51 1885,3355 TP7.1
D-: D1.3 J1.2 LED8.1 TP8.1 U1.6 | length 4534.9
  Top Layer w6: J1.2 242.24,2919.09 ; v2(560,2805) 560,2871.49 563.51,2875 761.83,2875 D1.3 ; D1.3@762.6,2895.77 758.37,2900 523.51,2900 520,2896.49 520,2828.12 516.49,2824.6 295.19,2824.6 242.24,2877.56 242.24,2919.09 ; U1.6 715.69,2270 681.9,2236.21 681.9,2233.79 648.11,2200 588.37,2200 578.37,2190 188.51,2190 185,2193.51 185,2861.85 242.24,2919.09 ; LED8.1 TP8.1
  Bottom Layer w6: v2(560,2805) 975,3220 975,3671.49 978.51,3675 1880,3675 1890,3685 TP8.1
DTR: C6.1 U1.13 | length 181.9
  Top Layer w6: U1.13 1132.49,2370 1136,2366.49 C6.1
GND: BZ1.1 C1.1 C2.1 C3.1 C4.1 C5.1 C7.1 C8.1 C9.1 C10.1 C11.2 C12.1 C13.1 C16.1 C17.1 C18.1 C19.1 C20.1 C21.1 C22.1 C23.1 D1.2 D2.3 D3.3 D4.3 D5.3 J1.5 J1.6 J1.7 J1.8 J1.9 J2.6 J3.5 J3.6 J3.7 J3.8 J3.9 J6.2 J6.3 J7.4 P1.2 P1.3 P2.2 P3.2 P3.3 R5.1 R6.2 R9.1 R12.1 R13.1 R19.1 R20.1 R23.1 R24.1 SW1.3 SW1.4 TP1.2 TP2.2 TP3.2 TP5.2 TP6.2 TP7.2 TP8.2 TP9.2 TP10.2 U1.1 U2.3 U3.3 U3.5 U3.21 U4.4 U4.5 U4.6 U5.2 Y1.2 Y1.4 Y2.2 Y2.4 | length 5131.2
  Top Layer w6: v1(75,240) 80.14,240 90.14,250 BZ1.1 ; J1.5 328.14,2863.11 418.11,2863.11 v1(420,2865) ; C17.1 423.5,1936 459.5,1900 v1(615,1900) ; v1@455.5,2255.5 C10.1@529.5,2255.5 ; v1(485,2080) 488.64,2076.36 488.64,2059.55 522.75,2025.43 Y2.2 ; v1(585,1355) 625,1395 J2.6 ; Y2.4 615,1956.8 v1(615,1900) ; v1(655,2515) 657.5,2517.5 765.5,2517.5 U1.1 ; v1(675,2845) 800.5,2845 805,2849.5 D1.2 ; C16.1 734,1900 v1(615,1900) ; v1(1255,700) 1255,784 C18.1 ; v1(1255,2115) 1349,2115 C9.1 ; v1(1475,2435) 1475,2354.13 SW1.4 SW1.3 ; v1(1630,3015) 1630,3114 R23.1 ; v1(1660,775) 1714.39,829.39 U3.21 ; R24.1 1665,3529 v1(1665,3590) ; C12.1 v1(1750,1545) ; v1(1855,1480) 1855,1423.2 Y1.4 1860.63,1421.5 1906.94,1375.19 1922.69,1375.19 Y1.2 2038.57,1354.57 C13.1 ; U3.5 1961.2,1123.83 1971.17,1123.83 2005.75,1089.25 2005.75,1079.28 U3.3 ; v1(2075,2230) 2075,2193.51 ; U4.6 2078.51,2140 2075,2143.51 2075,2193.51 ; U4.5 2078.51,2190 2075,2193.51 ; C23.1 2250,1856 v1(2250,1925.1) ; C20.1 2290,1311 2290,1410 v1(2293.03,1413.03) ; v1(2362.5,2240) 2362.5,2193.8 U4.4 ; v1(2370,3360) R13.1 ; R20.1 2515,2394 v1(2515,2475) ; v1(2515,1995) U5.2 ; R12.1 2570,2169 v1(2570,2255) ; v1(2590,3540) 2595.14,3540 2605.14,3530 C22.1 ; C21.1 v1(2705,1865) ; U2.3 2817.61,2180.78 2784.06,2180.78 2776.45,2188.39 2776.45,2258.55 v1(2775,2260) 2775,2400 2779,2404 R9.1 ; C19.1 v1(2950,3380) ; C11.2 3100,2044 v1(3100,1965) ; R19.1 v1(3310,2545) ; v1(3455,1640) 3455,1716.14 D3.3 ; v1(3460,850) 3460,936.14 D5.3 ; v1(3460,1250) 3460,1336.14 D4.3 ; v1(3460,2070.5) 3460,2121.14 D2.3 ; v1(3725,2140) 3725,2206 C4.1 ; v1(3730,1730) C1.1 ; v1(3735,950) C3.1 ; v1(3735,1360) C2.1
  Top Layer w20: C10.1@520,2250 C10.1@520.5,2250.5 ; C7.1 v1(580,3195) ; R6.2 735.5,3384.5 854.5,3384.5 v1(855,3385) ; v1(880,3510) C5.1 ; v1(1035,3270) 1035.5,3270.5 1119.5,3270.5 R5.1 ; C8.1 1323.65,2450 1328.65,2455 v1(1330,2455)
  other v1: 2770,700 1820,925 2195,995 2250,1095 1990,1105 2205,1150 455,2255 3040,2350 3055,2475 610,2785 980,2835
IO2: J4.3 U3.32 | length 1453.8
  Top Layer w6: U3.32 2103.85,1010 2140,1010 v2(2145,1015)
  Bottom Layer w6: J4.3 1495,1015 v2(2145,1015)
IO3: J4.4 R2.2 U3.1 | length 2976.1
  Top Layer w6: U3.1 2085.56,1070 v2(2200,1070) ; v2(2745,845) 2895,845 3039,701 R2.2
  Bottom Layer w6: J4.4 1540,1070 v2(2200,1070) 2425,845 v2(2745,845)
IO4: J4.5 U3.2 | length 1258.5
  Top Layer w6: U3.2 2116,1144.28 2149.28,1144.28 v2(2150,1145)
  Bottom Layer w6: J4.5 1580,1130 1851.55,1130 1866.55,1145 v2(2150,1145)
IO5: J4.6 U3.9 | length 859.1
  Top Layer w6: J4.6 1345,1565 1350,1570 1621.49,1570 1625,1566.49 1625,1313.29 U3.9
IO6: J4.7 U3.10 | length 721.1
  Top Layer w6: J4.7 1445,1546.49 1448.51,1550 1601.49,1550 1605,1546.49 1605,1289.45 U3.10
IO7: J4.8 U3.11 | length 433.3
  Top Layer w6: J4.8 1545,1304.2 U3.11
IO8: J7.10 U3.12 | length 1080.8
  Top Layer w6: J7.10 725,1290 875,1290 967.95,1197.05 1598.4,1197.05 1705.86,1089.6 U3.12
IO9: BZ1.2 J7.9 U3.13 | length 2053.1
  Top Layer w6: J7.9 723.95,1181.05 1569.15,1181.05 1683.23,1066.97 U3.13
  Bottom Layer w6: BZ1.2 487.95,913.76 720,1145.81 J7.9
MCU_RESET: C6.2 C9.2 J2.3 J6.6 R1.1 SW1.1 SW1.2 TP2.1 U3.29 | length 4529.9
  Top Layer w6: J2.3 536.88,1461.88 536.88,1494 573,1530.12 573,1565.88 607.12,1600 v2(1235,1600) ; C6.2 1259,2315 1341.49,2315 1345,2311.49 1345,2239 C9.2 1473.13,2234 SW1.2 SW1.1 1854.94,2235.94 R1.1 1855,1992.23 1830,1967.23 TP2.1 ; U3.29 1980.36,825 2190,825 2475,1110 J6.6
  Bottom Layer w6: v2(1235,1600) 1235,1846.49 1283.13,1894.62 1769.62,1894.62 TP2.1 1830,1840 2529.67,1140.33 2529.67,1120.33 J6.6
MCU_XTAL1: C12.2 R7.1 U3.7 Y1.1 | length 603.2
  Top Layer w6: C12.2 Y1.1@1846.33,1361 ; R7.1 1846,1536.5 1816.14,1506.64 1816.14,1391.19 Y1.1@1846.33,1361 ; U3.7 1939.15,1190.88 1939.15,1221.18 1856.7,1303.64 Y1.1 1852.76,1354.57 Y1.1@1846.33,1361
MCU_XTAL2: C13.2 R7.2 U3.8 Y1.3 | length 1209.7
  Top Layer w6: U3.8 1905,1200.56 1905,1220 1805,1320 1715.12,1320 1701.5,1333.62 1701.5,1591.36 1715.14,1605 1961.49,1605 1965,1601.49 1965,1551 R7.2 2036.49,1550 2040,1546.49 C13.2 2039,1475 1953.51,1475 1950,1471.49 1950,1428.18 Y1.3
MISO: J2.1 J7.6 U3.16 | length 1946.7
  Top Layer w6: J2.1 423.51,1650 420,1646.49 420,1185 J7.6 1511.15,885 U3.16
MOSI: J2.5 J7.7 U3.15 | length 1695.6
  Top Layer w6: J2.5 700,1550 710,1540 710,1358.51 706.49,1355 650,1355 645,1350 645,1060 J7.7 777.15,1042.15 1618.95,1042.15 1638.68,1022.43 U3.15
NetC10_2: C10.2 U1.4 | length 240.4
  Top Layer w6: C10.2 534,2370 U1.4
  Top Layer w20: U1.4@767.5,2369.5 U1.4
NetD2_4: D2.4 D3.2 | length 326.1
  Top Layer w6: D3.2 3460,1925.86 3460,2041.49 3463.51,2045 3584.99,2045 3588.5,2048.51 D2.4
NetD3_4: D3.4 D4.2 | length 293.5
  Top Layer w6: D4.2 3460,1543.86 3460,1606.49 3463.51,1610 3577,1610 3583.5,1616.5 D3.4
NetD4_4: D4.4 D5.2 | length 317.4
  Top Layer w6: D5.2 3460,1143.86 3460,1206.49 3463.51,1210 3580,1210 3588.5,1218.5 D4.4
NetD5_4: D5.4 R2.1 | length 108.7
  Top Layer w6: D5.4 3591,935.14 R2.1@3591,830
NetJ3_1: J3.1 SW4.1 | length 184.7
  Top Layer w20: SW4.1 3391.1,3138.9 3572.64,3138.9 J3.1
NetLED1_2: LED1.2 R5.2 | length 192
  Top Layer w20: R5.2 LED1.2
NetLED2_2: LED2.2 R6.1 | length 157
  Top Layer w20: LED2.2 R6.1
NetLED4_2: LED4.2 R13.2 | length 127
  Top Layer w20: R13.2 LED4.2
NetLED5_2: LED5.2 R21.2 | length 136.2
  Top Layer w6: LED5.2 221,823 R21.2
NetLED6_2: LED6.2 R22.2 | length 125
  Top Layer w20: R22.2 LED6.2
NetLED7_2: LED7.2 R23.2 | length 136.4
  Top Layer w6: R23.2 1750,3116 LED7.2
NetLED8_2: LED8.2 R24.2 | length 111.4
  Top Layer w6: R24.2 1889,3525 LED8.2
NetP2_1: P2.1 SW5.1 | length 497.2
  Top Layer w20: SW5.1 3523.28,2720 3540,2703.28 3540,2582.82 3551.72,2571.1 P2.1
NetP3_1: P3.1 SW6.1 | length 233.8
  Top Layer w20: SW6.1 P3.1
NetQ1_1: Q1.1 U4.1 | length 1635.6
  Top Layer w20: U4.1 2241.72,2040 2230,2051.72 2230,3195.69 2241.72,3207.4 Q1.1
NetR3_2: R3.2 U1.2 | length 346.7
  Top Layer w6: R3.2@425,2461 434,2470 U1.2
NetR4_2: R4.2 U1.3 | length 443.4
  Top Layer w6: R4.2 326,2420 U1.3
NetR8_1: R8.1 SW3.2 TP3.1 | length 714.1
  Top Layer w20: R8.1 1145,3005 ; SW3.2 1145,3005 ; TP3.1 1360,3016.72 1348.28,3005 1145,3005
NetR9_2: R9.2 U2.1 | length 152.7
  Top Layer w6: U2.1 2817.91,2219.37 2815,2222.28 2815,2276.49 2818.51,2280 2899,2280 R9.2
NetR12_2: R12.2 U5.6 | length 133
  Top Layer w6: R12.2 2685.08,2163.92 U5.6
NetR17_2: R17.2 SW7.1 | length 226
  Top Layer w20: R17.2 SW7.1
NetR18_2: R18.2 SW7.3 | length 228.1
  Top Layer w20: R18.2 2480,2669 SW7.3
NetU4_3: U4.3 U5.1 | length 329.7
  Top Layer w6: U4.3 2460,2140 2465,2135 2465,2038.51 2471.11,2032.4 U5.1
RX_MCU: J4.1 R3.1 R21.1 TP9.1 U3.30 | length 5233.5
  Top Layer w6: R21.1 110,816 TP9.1@110,685 ; R3.1 526,2584 v2(530,2580) ; v2(1870,890) 1894.2,914.2 1935,914.2 U3.30 1961.62,877.67 U3.30@1947.12,892.18
  Bottom Layer w6: v2(530,2580) 35,2580 31.49,2576.49 31.49,743.51 TP9.1 623,1228 723.81,1228 845,1349.19 J4.1 1435,875 1639.05,875 1654.05,890 v2(1870,890)
SCK: J2.2 J7.5 U3.17 | length 2357.8
  Top Layer w6: J2.2 573,1598 573,1669.88 544.88,1698 383.51,1698 380,1694.49 380,1125 J7.5 783.37,848.37 1552.8,848.37 U3.17
SS: J7.8 U3.14 | length 967.8
  Top Layer w6: J7.8 1621.36,1085 1661.31,1045.05 U3.14
TX_MCU: J4.2 R4.1 R22.1 TP10.1 U3.31 | length 3660.8
  Top Layer w6: R22.1 70,1655 TP10.1 ; R4.1 391,2301 430,2340 v2(430,2345) ; v2(1870,955) 1939.45,955 U3.31
  Bottom Layer w6: v2(430,2345) 58.51,2345 55,2341.49 55,1670 TP10.1 213,1698 712,1698 J4.2 1455,955 v2(1870,955)
V_Current_ADC: Q1.2 SW7.2 U2.4 U4.2 | length 2696.4
  Top Layer w6: 2577.8,2980 2736.49,2980 2740,2976.49 2740,2185 2764.68,2160.32 U2.4
  Top Layer w20: U4.2 2296.72,2090 2280,2106.72 2280,3120.88 2291.72,3132.6 Q1.2 2576.18,3132.6 2577.8,3130.98 2577.8,2980 2577.8,2892.2 SW7.2
V_Current_GND: R17.1 R18.1 R20.2 U2.5 | length 829.1
  Top Layer w6: R20.2 2629,2318.51 2632.51,2315 2720.49,2315 2724,2311.49 2724,2166 2749.37,2140.63 U2.5
  Top Layer w20: R18.1 R17.1 2685,2541 2685,2406.72 2673.28,2395 2634,2395 R20.2
V_VRM_ADC: R14.1 R15.2 R16.2 U2.6 | length 1138.1
  Top Layer w6: R15.2 2866,2443.51 2870.51,2439 2945.88,2439 2947.88,2437 3071.49,2437 3075,2433.49 3075,2143.51 3071.49,2140 2992.24,2140 U2.6
  Top Layer w20: R15.2 2868.5,2627.5 2868.5,2817.5 R16.2 2882.72,2831.72 2882.72,2885 2923.28,2885 2935,2896.72 R14.1
V_VRM_GND: R15.1 R16.1 R19.2 U2.7 | length 859.7
  Top Layer w6: U2.7 2991.93,2160 3041.49,2160 3045,2163.51 3045,2290 2995,2340
  Top Layer w20: R16.1 2986.5,2817.5 2986.5,2627.5 R15.1 2984,2556.72 2995.72,2545 ; 2995,2340 v2(2995,2385) ; v2(2995,2475) 2995.72,2475.72 2995.72,2545 ; R19.2 2995.72,2545
  Bottom Layer w20: v2(2995,2385) v2(2995,2475)
VRM_IN: C19.2 C22.2 LED4.1 Q1.3 R14.2 SW4.2 SW5.2 SW6.2 TP6.1 | length 2916.2
  Top Layer w20: Q1.3 2797.28,3170 ; R14.2 2811.72,3059 2800,3070.72 2800,3167.28 2797.28,3170 ; C19.2 2798.28,3171 ; SW6.2 3116.72,3756.72 3050,3756.72 ; SW5.2 3061.72,2720 3050,2731.72 3050,3140 ; SW4.2 3050,3140 ; 2797.28,3170 2798.28,3171 ; 2798.28,3171 2809,3181.72 LED4.1 C22.2 2809.5,3530.5 2809.5,3744.5 TP6.1 2993.28,3745 3005,3756.72 3050,3756.72 ; 3050,3140 3050,3756.72
VUSB_5V: C7.2 J1.1 LED2.1 SW3.3 | length 795.6
  Top Layer w20: J1.1 328.15,2989.1 578.1,2989.1 C7.2 LED2.1 908.28,2991 920,3002.72 920,3068.28 931.72,3080 SW3.3
pads on no net: D1.4 D1.6 D2.2 J1.4 J3.2 J3.3 J3.4 J6.5 J6.8 U1.9 U1.10 U1.11 U1.12 U1.14 U1.15 U2.2 U3.19 U3.22 U4.7

## Polygon pours and split planes (outlines as drawn)
GND on GND_UPR "NONET_L-01_P-001" (solid, pour order 0): 0,3900 3900,3900 3900,0 0,0
GND on GND_DWN "NONET_L-01_P-001" (solid, pour order 1): 0,3900 3900,3900 3900,0 0,0

## Keep-outs
Keep-Out Layer:
  the board outline again, w20

## Silkscreen, mask and mechanical layers (free items; w line width, h text height)
Top Overlay:
  text "D-" at 2140,3830 h30
  text "Input Voltage" at 2205,3640 h30
  text "PWR SELECT" at 3150,3355 h30
  text "Inrush I/P" at 1265,3310 h30 r90
  text "D+" at 1995,3250 h30
  text "Input Voltage" at 75,3175 h30
  text "PWR SELECT" at 990,2985 h30
  text "PWR SELECT" at 3210,2910 h30
  text "GND SELECT" at 2440,2785 h30
  text "Inrush O/P" at 1475,2705 h30
  text "RESET" at 1475,1830 h30
  text "5V" at 2405,1570 h30
  text "GND" at 2380,1395 h30
  text "Rx" at 850,1325 h30 r90
  text "Tx" at 965,1325 h30 r90
  text "IO3" at 1165,1320 h30 r90
  text "IO9" at 790,1175 h30
  text "Tx" at 35,1095 h30
  text "SCL" at 2390,755 h30
  text "SDA" at 2390,660 h30
  text "Rx" at 240,530 h30
  text "SDA" at 790,470 h30
  text "Pradyumna Gudluru" at 2945,458.33 h40
  text "ECEN_5730" at 2950,366.66 h40
  text "SCL" at 790,365 h30
  text "Board_4" at 2960,276.66 h40
  text "PCB_Project_Board_4" at 2950,193.33 h40